# Altium PCB PCB1.PcbDoc
Units mm, origin at the board's own origin, x right, y up, seen from the top; angles counter-clockwise.
Board outline 25 x 18 mm, 2 copper layers (Top Layer, Bottom Layer); 4 components, 9 nets, 25 pads, 12 vias.
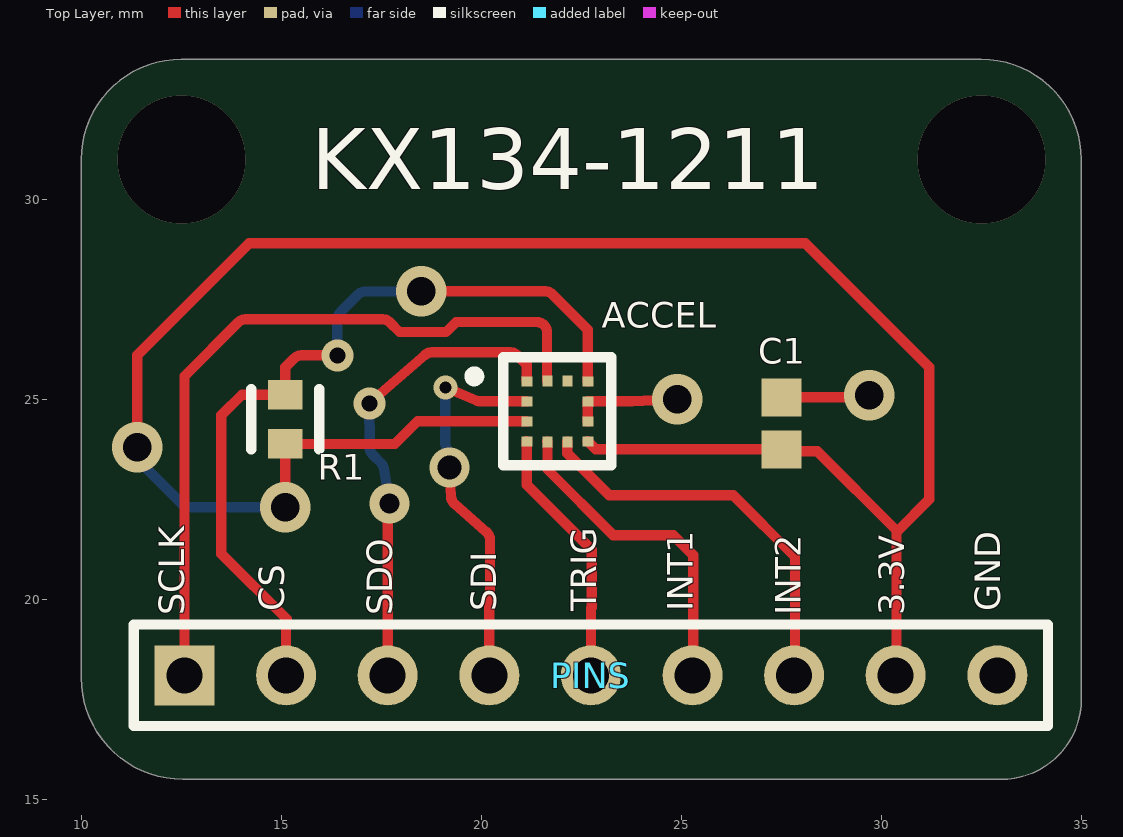
[diagram p0: Top Layer view]
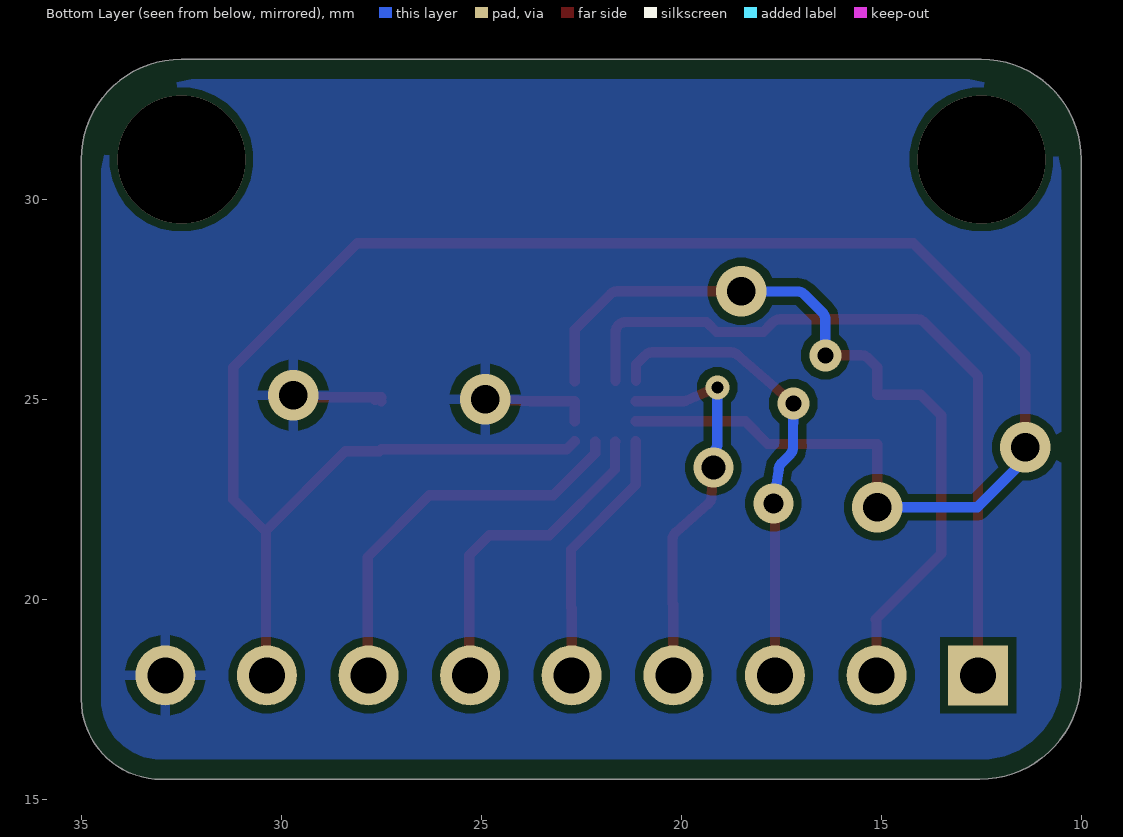
[diagram p1: Bottom Layer view, seen from below]

## Layer stack, top to bottom
Top Solder: solder mask 0.0102, Solder Resist, Dk 3.5
Top Layer: signal copper 0.0356
Dielectric 1: dielectric 0.32, FR-4, Dk 4.8
Bottom Layer: signal copper 0.0356
Bottom Solder: solder mask 0.0102, Solder Resist, Dk 3.5

## Board outline
10,31 cw(c12.5,31) 12.5,33.5 32.5,33.5 cw(c32.5,31) 35,31 35,17.5 cw(c33,17.5) 33,15.5 12.54,15.5 cw(c12.54,18.04) 10,18.04 10,18.5

## Design rules (kind name [scope] priority, off if disabled: settings)
Clearance [All] p1: gap=0.2 ignorepadtopadclearanceinfootprint=FALSE
PolygonConnect [All] p1: connectstyle=Relief reliefconductorwidth=0.254 reliefentries=4 polygonreliefangle="90 Angle" airgapwidth=0.254
RoomDefinition Sheet1 [InComponentClass('Sheet1')] p1: confinementstyle=ConfineIn formatcopy=TRUE lockcomponents=FALSE outline 10,15.7 35,15.7 35,33.3 10,33.3
RoutingVias [All] p1: holewidth=0.711 width=1.27 viastyle="Through Hole" minholewidth=0.711 minwidth=1.27 maxholewidth=0.711 maxwidth=1.27
SolderMaskExpansion [All] p1: expansion=0.102 istentingtop=FALSE
Width [All] p1: maxlimit=0.254 minlimit=0.254 preferedwidth=0.254
30 further rules are at their usual default settings.

## Classes and differential pairs
component class Sheet1: ACCEL C1 R1

## Components (designator, comment, footprint, x,y, rotation, side; value= is the part's Value field where it differs from the comment)
ACCEL "KX134-1211" FP-KX134-1211-MFG 21.9,24.7 r0 top
C1 "0603 0.1 uF" CAPC1608X95X40NL15T15 27.5,24.4 r90 top
PINS "Header 9" HDR1X9 12.58,18.1 r0 top
R1 "0603 10k" FP-CRCW0603-e3-IPC_C 15.1,24.5 r90 top

## Footprints (in the part's own frame and the unit in brackets; to place one, negate y for a bottom-side part, rotate by r counter-clockwise, add the part's x,y. Pads: shape width x height; smd on the part's side, far side on the other; paste and mask are expansions set on the pad)
CAPC1608X95X40NL15T15 [mm] "Chip Capacitor, 2-Leads, Body 1.60x0.80mm, IPC Medium Density"
  rect 0.95x1 smd: 1(-0.65,0) 2(0.65,0)
  body extent -0.88,-0.48 0.87,0.47, height 0.95
FP-CRCW0603-e3-IPC_C [mm]
  rect 0.735x0.862 smd paste+0 mask+0: 1(-0.615,0) 2(0.615,0)
  silkscreen extent -0.75,-0.85 0.75,0.85, body extent -1.08,-0.58 1.08,0.58, height 0.25
FP-KX134-1211-MFG [mm]
  rect 0.275x0.25 smd paste-1000 mask+0: 1(-0.763,0.75) 2(-0.763,0.25) 3(-0.763,-0.25) 4(-0.763,-0.75) 8(0.763,-0.25) 9(0.763,0.25) 10(0.763,0.75)
  rect 0.25x0.275 smd paste-1000 mask+0: 5(-0.25,-0.763) 6(0.25,-0.763) 11(0.25,0.763) 12(-0.25,0.763)
  rect 0.275x0.25 smd mask+0: 7(0.763,-0.75)
  silkscreen extent -2.2,-1.35 1.35,1.35, body extent -1.54,-1.54 1.54,1.54, height 0.25
HDR1X9 [mm] "Connector; Header; 9 Position"
  rect 1.5x1.5 hole 0.9: 1(0,0)
  round 1.5 hole 0.9: 2(2.54,0) 3(5.08,0) 4(7.62,0) 5(10.16,0) 6(12.7,0) 7(15.24,0) 8(17.78,0) 9(20.32,0)
  silkscreen extent -1.27,-1.27 21.59,1.27

## Part data
ACCEL: library part CMP-223024-000001-1, "105C OPERATING HIGHER BANDWIDTH,"
C1: library part CMP-2006-01670-1, Manufacturer=Vitramon, Part Number=VJ0603A101KXBCW1BC
PINS: "Header, 9-Pin", LatestRevisionDate=17-Jul-2002, LatestRevisionNote="Re-released for DXP Platform.", Publisher="Altium Limited"
R1: library part CMP-2000-03828-2, "RES Thick Film, 100Ω, 5%, 0.1W, 200ppm/°C, 0603", Case Code (Imperial)=0603, Case Code (Metric)=1608, Max Operating Temperature=155°C, Max Power Dissipation=100mW, Min Operating Temperature=-55°C, Package Quantity=10000, Resistance=100R, Resistance Tolerance=5%, Resistor Type="Thick Film", Temperature Coefficient=200ppm/°C, Voltage Rating=75V, Case/Package=0603, Construction=Rectangular, Contact Plating=Tin, Depth=0.85mm, Features="Automotive AEC-Q200", Height=0.02inch, Lead Free="Lead Free", Length=1.55mm, Military Standard=Not, Number of Terminations=2, Packaging="Tape and Reel", Power Rating=100mW, Radiation Hardening=No, RoHS Compliant=Yes, Series=CRCW, Tolerance=5%, Voltage Rating (DC)=75V, Weight=7.1E-05oz, Width=0.033inch

## Via types
v1: diameter 1.27, hole 0.711, Top Layer to Bottom Layer, 5 vias
v2: diameter 0.8, hole 0.4, Top Layer to Bottom Layer, 2 vias
v3: diameter 3.2, hole 3.2, Top Layer to Bottom Layer, 2 vias
v4: diameter 1, hole 0.5, Top Layer to Bottom Layer, 1 vias
v5: diameter 0.6, hole 0.3, Top Layer to Bottom Layer, 1 vias
v6: diameter 1, hole 0.6, Top Layer to Bottom Layer, 1 vias

## Nets (pads, with @x,y where several pads share a name; then routed paths per layer and width w, separated by ;. In a path a pad name is that pad's centre, name@x,y a point inside that pad or via, vN(x,y) a via of type N, cw(c..) or ccw(c..) an arc to the next point about the centre after c; other vN are vias at no path point)
CS: ACCEL.10 PINS.2 R1.2 | length 20.3
  Top Layer w0.254: PINS.2 15.12,19.48 15.14,19.5 13.5,21.14 13.5,24.6 14.015,25.115 R1.2 15.1,25.8 15.326,26.026 cw(c15.505,25.846) 15.505,26.1 v2(16.4,26.1) ; v1(18.5,27.7) 21.593,27.702 cw(c21.593,27.448) 21.77,27.63 21.771,27.629 22.662,26.737 ACCEL.10
  Bottom Layer w0.254: v2(16.4,26.1) 16.4,26.996 cw(c16.654,26.995) 16.473,27.173 16.925,27.625 cw(c17.104,27.445) 17.104,27.699 v1(18.5,27.7)
GND: ACCEL.8 ACCEL.9 C1.2 PINS.9 | length 5.2
  Top Layer w0.2: C1.2@27.533,25.017 ccw(c27.674,25.159) C1.2@27.673,24.959
  Top Layer w0.254: ACCEL.8 ACCEL.9 23.757,24.95 ccw(c23.757,25.204) 23.768,24.95 v1(24.9,25) ; C1.2@27.5,24.95 C1.2@27.55,25 ; C1.2@27.533,25.017 C1.2 v1@29.65,25.05
  other v1: 29.7,25.1
INT1: ACCEL.5 PINS.6 | length 8.2
  Top Layer w0.254: ACCEL.5 21.656,23.931 21.656,23.244 23.3,21.6 24.8,21.6 25.3,21.1 25.3,18.12 PINS.6
INT2: ACCEL.6 PINS.7 | length 10
  Top Layer w0.254: ACCEL.6 22.15,23.65 23.2,22.6 26.3,22.6 27.84,21.06 27.84,18.12 PINS.7
SCLK: ACCEL.12 PINS.1 | length 18.7
  Top Layer w0.254: PINS.1 12.58,25.58 13.926,26.926 cw(c14.105,26.746) 14.105,27 17.532,27 cw(c17.532,26.746) 17.711,26.926 17.953,26.684 19.121,26.684 19.367,26.93 21.39,26.93 cw(c21.39,26.676) 21.644,26.676 ACCEL.12@21.644,25.462
SDI: ACCEL.2 PINS.4 | length 9.8
  Top Layer w0.254: v5(19.1,25.3) 19.874,24.97 ccw(c19.973,25.204) 19.973,24.95 ACCEL.2 ; v6(19.2,23.3) 19.244,22.565 ccw(c19.497,22.581) 19.328,22.391 20.135,21.676 cw(c19.966,21.486) 20.22,21.487 ; PINS.4 20.2,19.88 20.22,19.9 20.22,21.486
  Bottom Layer w0.254: v5(19.1,25.3) 19.1,23.895 ccw(c19.354,23.896) 19.154,23.739 cw(c18.617,23.317) 19.244,23.587 cw(c19.011,23.487) 19.236,23.368 v6(19.2,23.3)
SDO: ACCEL.1 PINS.3 | length 11.9
  Top Layer w0.254: v2(17.2,24.9) 18.6,26.114 cw(c18.766,25.922) 18.764,26.176 20.719,26.176 cw(c20.719,25.922) 20.898,26.102 21.136,25.864 ACCEL.1@21.136,25.462 ; PINS.3 17.66,22.36 v4(17.7,22.4)
  Bottom Layer w0.254: v2(17.2,24.9) 17.209,23.826 cw(c16.955,23.823) 17.209,23.81 ccw(c17.462,23.797) 17.282,23.618 ; 17.283,23.617 17.492,23.408 ; 17.493,23.407 cw(c17.312,23.228) 17.563,23.268 v4(17.7,22.4)
SOURCE: ACCEL.3 ACCEL.7 C1.1 PINS.8 R1.1 | length 53.6
  Top Layer w0.254: v1(11.4,23.8) 11.4,26.1 14.2,28.9 28.1,28.9 31.2,25.8 31.2,22.5 30.42,21.72 30.38,21.72 ; v1(15.1,22.3) 15.1,22.6 R1.1 17.837,23.885 18.403,24.45 20.836,24.45 ACCEL.3 ; ACCEL.7 22.863,23.75 C1.1 27.55,23.7 28.4,23.7 30.38,21.72 ; PINS.8 30.38,18.12 30.38,21.72
  Bottom Layer w0.254: v1(11.4,23.8) 11.4,23.5 12.6,22.3 v1(15.1,22.3)
TRIG: ACCEL.4 PINS.5 | length 6.5
  Top Layer w0.254: ACCEL.4 21.137,22.862 22.76,21.24 22.76,19.8 22.74,19.78 PINS.5
pads on no net: ACCEL.11
copper on no net:
  other v3: 12.5,31 32.5,31

## Polygon pours and split planes (outlines as drawn)
GND on Bottom Layer "GND_L02_P000" (solid, pour order 0): 10.5,30.46 cw(c13.04,30.46) 13.04,33 32,33 cw(c32,30.5) 34.5,30.5 34.5,17.5 cw(c33,17.5) 33,16 12.5,16 cw(c12.5,18) 10.5,18 10.5,21.5

## Silkscreen, mask and mechanical layers (free items; w line width, h text height)
Top Overlay:
  text "KX134-1211" at 15.754,30.254 h1.52
  text "CS" at 15.287,19.7 h1.1 r90
  text "SDI" at 20.588,19.7 h1.1 r90
  text "TRIG" at 23.086,19.7 h1.1 r90
  text "INT1" at 25.5,19.7 h1.1 r90
  text "GND" at 33.186,19.7 h1.1 r90
  text "SCLK" at 12.787,19.6 h1.1 r90
  text "SDO" at 17.986,19.6 h1.1 r90
  text "INT2" at 28.2,19.6 h1.1 r90
  text "3.3V" at 30.786,19.6 h1.1 r90